# Altium PCB BoardV2.PcbDoc (part 2 of 2)
Units mm, origin at the board's own origin, x right, y up, seen from the top; angles counter-clockwise.
Board outline 173.2 x 200 mm, 2 copper layers (Top Layer, Bottom Layer); 157 components, 96 nets, 533 pads, 72 vias.
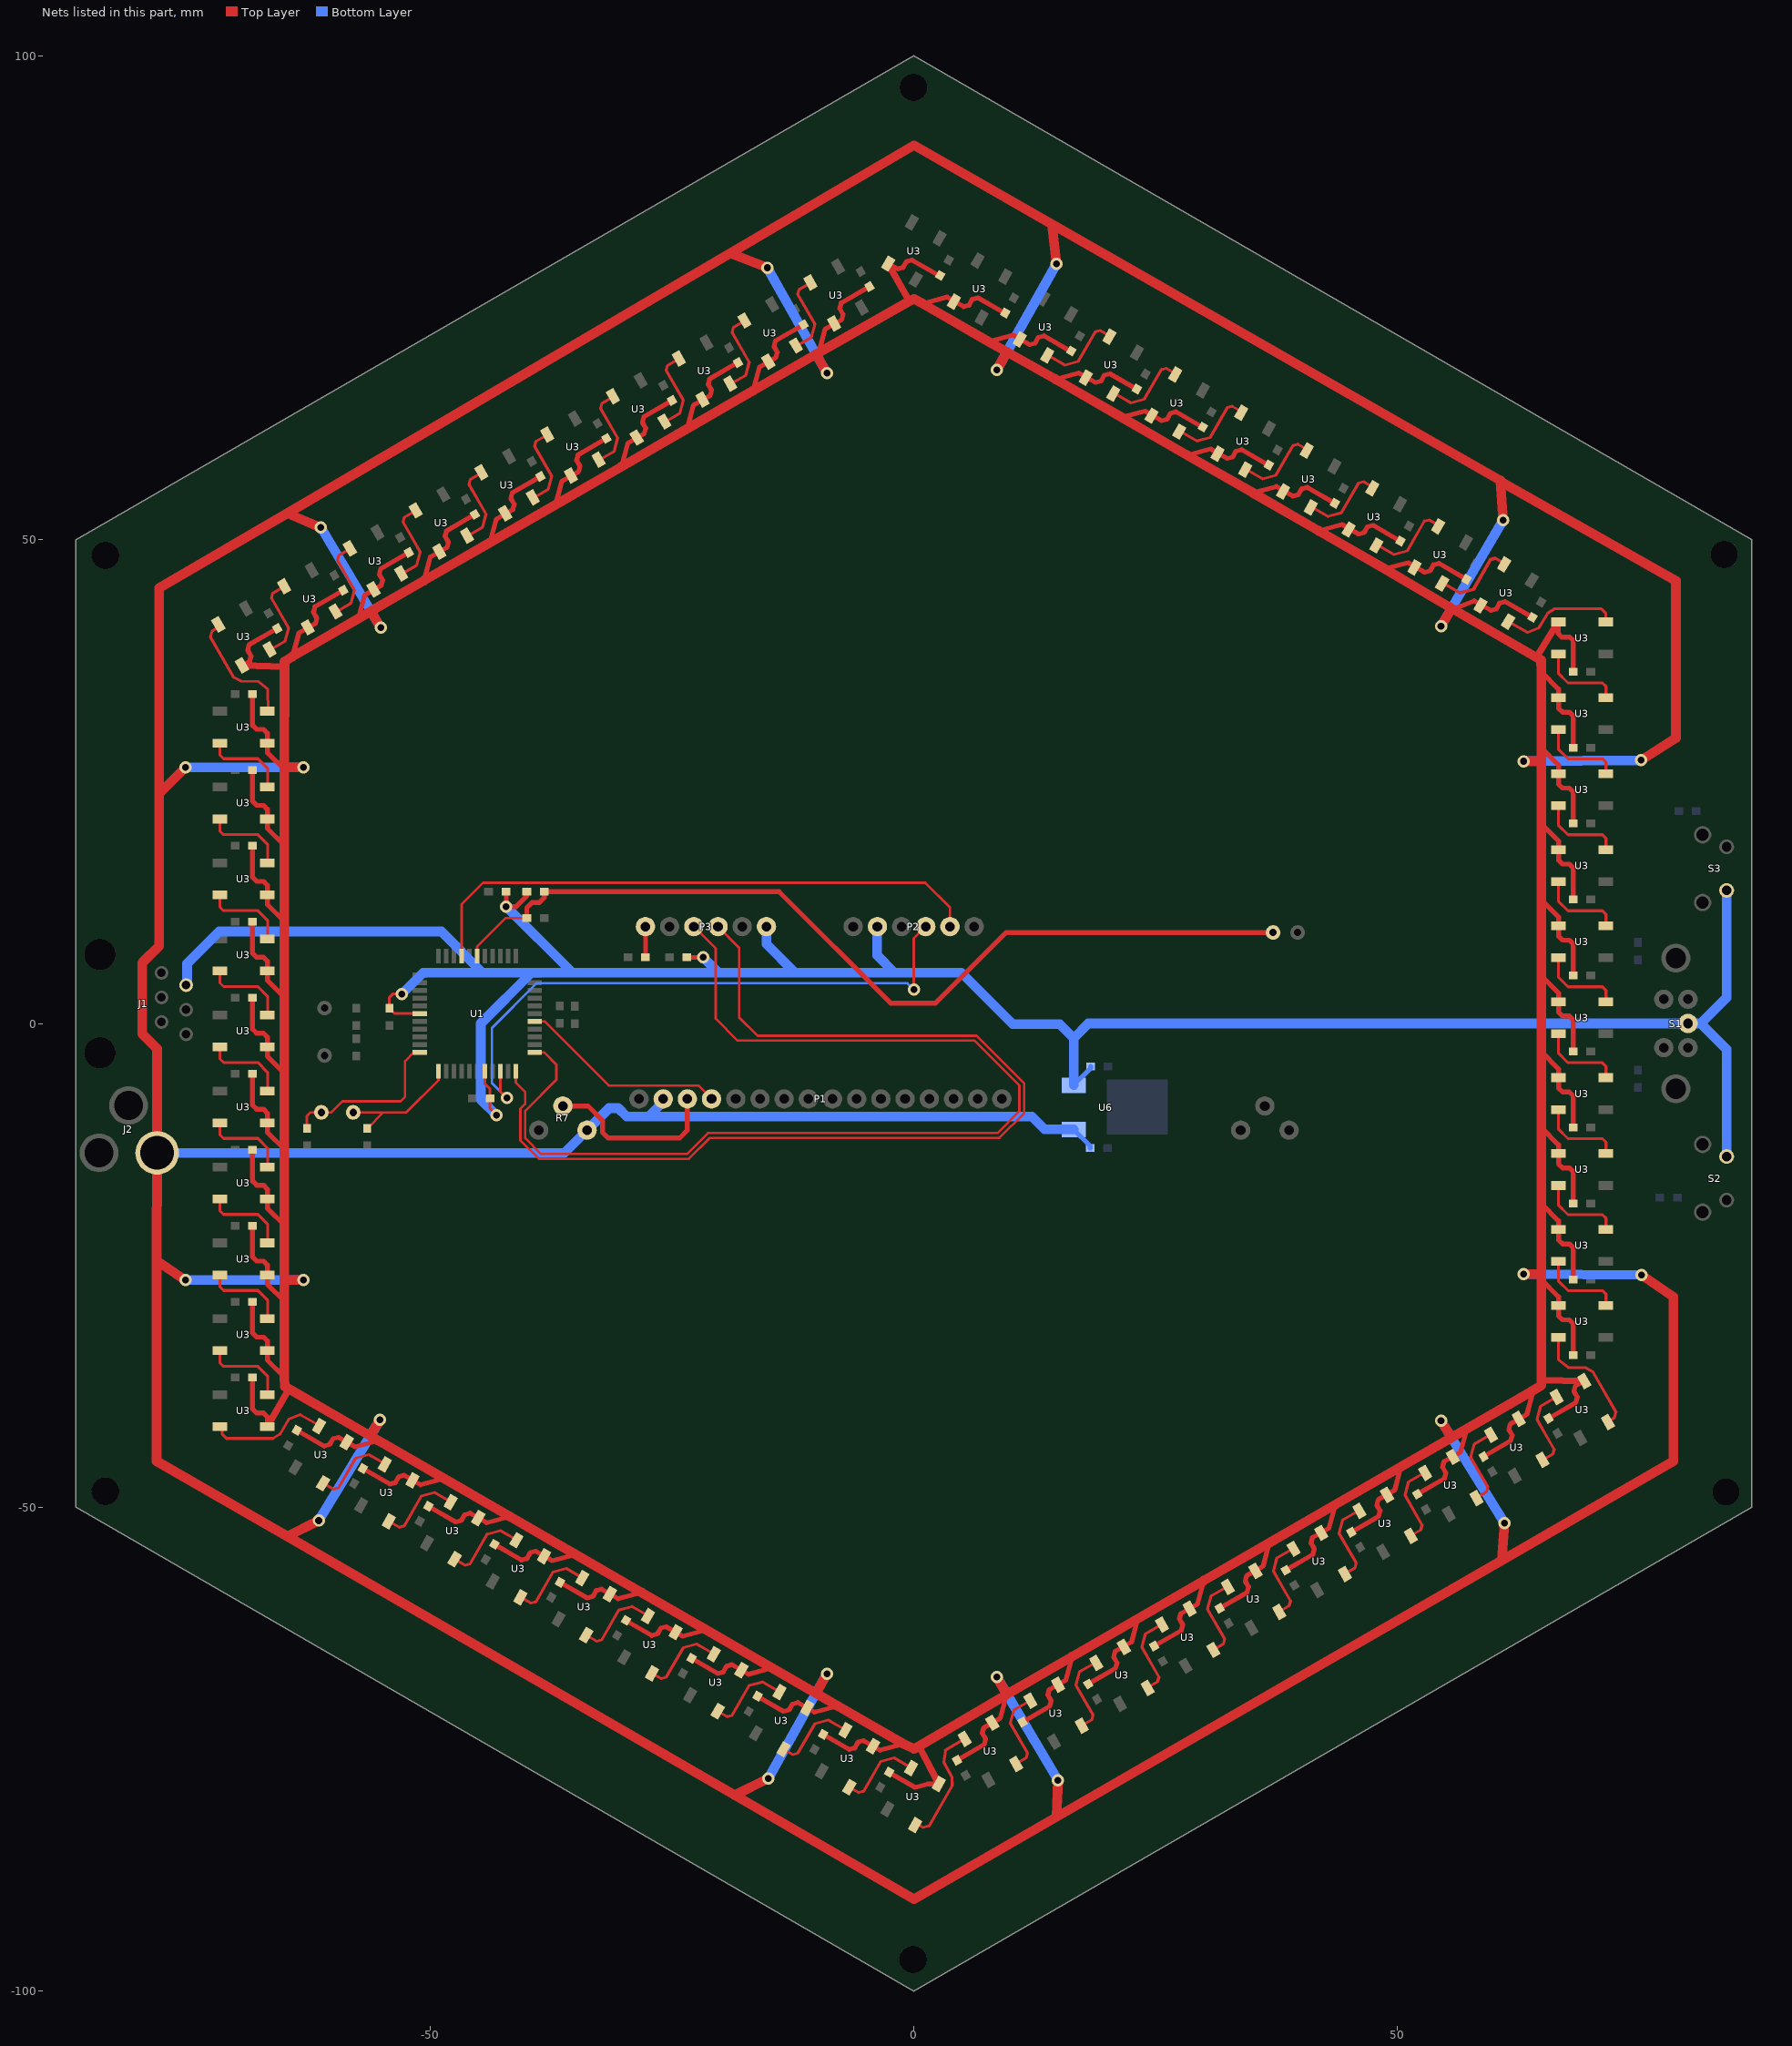
[diagram p2: the nets of this part, all layers, seen from the top]

## Via types
v1: diameter 1.27, hole 0.711, Top Layer to Bottom Layer, 72 vias

## Nets (pads, with @x,y where several pads share a name; then routed paths per layer and width w, separated by ;. In a path a pad name is that pad's centre, name@x,y a point inside that pad or via, vN(x,y) a via of type N, cw(c..) or ccw(c..) an arc to the next point about the centre after c; other vN are vias at no path point) (continued)
PX4: U3.2@13.794,69.032 U3.4@20.206,70.988 | length 8.7
  Top Layer w0.3: U3.2@13.846,69.06 15.605,68.045 16.978,68.413 18.753,71.487 19.26,71.623 U3.4@20.245,71.055
PX5: U3.2@20.614,65.094 U3.4@27.013,67.058 | length 8.7
  Top Layer w0.3: U3.2@20.666,65.152 22.424,64.137 23.797,64.505 25.572,67.579 26.079,67.715 U3.4@27.064,67.146
PX6: U3.2@27.421,61.164 U3.4@33.833,63.12 | length 8.7
  Top Layer w0.3: U3.2@27.486,61.214 29.244,60.199 30.617,60.567 32.392,63.642 32.899,63.778 U3.4@33.884,63.209
PX7: U3.2@34.241,57.227 U3.4@40.61,59.208 | length 8.7
  Top Layer w0.3: U3.2@34.262,57.302 36.021,56.287 37.394,56.655 39.169,59.729 39.676,59.865 U3.4@40.661,59.296
PX8: U3.2@41.018,53.314 U3.4@47.387,55.295 | length 8.7
  Top Layer w0.3: U3.2@41.051,53.411 42.81,52.396 44.183,52.764 45.958,55.838 46.465,55.974 U3.4@47.45,55.406
PX9: U3.2@47.794,49.402 U3.4@54.185,51.37 | length 8.7
  Top Layer w0.3: U3.2@47.85,49.486 49.608,48.471 50.981,48.839 52.756,51.913 53.264,52.049 U3.4@54.248,51.481
PX10: U3.2@54.593,45.477 U3.4@61.005,47.433 | length 17.3
  Top Layer w0.3: U3.2@54.67,45.549 56.428,44.533 57.801,44.901 59.576,47.976 60.083,48.112 U3.4@61.068,47.543 ; U3.2@54.717,45.491 56.476,44.476 57.849,44.844 59.624,47.918 60.131,48.054 U3.4@61.116,47.485
PX11: U3.2@61.413,41.539 U3.4@71.5,41.5 | length 12.6
  Top Layer w0.3: U3.2@61.413,41.539 63.421,40.41 64.6,40.875 65.501,42.389 66.25,42.856 71.044,42.856 71.5,42.4 U3.4@71.5,41.5
PX12: U3.2@66.6,38.2 U3.4@71.5,33.65 | length 8.7
  Top Layer w0.3: U3.2@66.598,38.229 66.598,36.199 67.604,35.193 71.154,35.193 71.525,34.822 U3.4@71.525,33.685
PX13: U3.2@66.6,30.35 U3.4@71.5,25.8 | length 8.7
  Top Layer w0.3: U3.2@66.598,30.379 66.598,28.349 67.604,27.343 71.154,27.343 71.525,26.972 U3.4@71.525,25.835
PX14: U3.2@66.6,22.5 U3.4@71.5,17.95 | length 8.7
  Top Layer w0.3: U3.2@66.598,22.529 66.598,20.499 67.604,19.493 71.154,19.493 71.525,19.122 U3.4@71.525,17.985
PX15: U3.2@66.6,14.65 U3.4@71.5,10.1 | length 8.7
  Top Layer w0.3: U3.2@66.598,14.679 66.598,12.649 67.604,11.643 71.154,11.643 71.525,11.272 U3.4@71.525,10.135
PX16: U3.2@66.6,6.8 U3.4@71.5,2.25 | length 8.7
  Top Layer w0.3: U3.2@66.598,6.829 66.598,4.799 67.604,3.793 71.154,3.793 71.525,3.422 U3.4@71.525,2.285
PX17: U3.2@66.6,-1.05 U3.4@71.5,-5.6 | length 8.7
  Top Layer w0.3: U3.2@66.598,-1.021 66.598,-3.051 67.604,-4.057 71.154,-4.057 71.525,-4.428 U3.4@71.525,-5.565
PX18: U3.2@66.6,-8.9 U3.4@71.5,-13.45 | length 8.7
  Top Layer w0.3: U3.2@66.598,-8.871 66.598,-10.901 67.604,-11.907 71.154,-11.907 71.525,-12.278 U3.4@71.525,-13.415
PX19: U3.2@66.6,-16.75 U3.4@71.5,-21.3 | length 8.7
  Top Layer w0.3: U3.2@66.598,-16.721 66.598,-18.751 67.604,-19.757 71.154,-19.757 71.525,-20.128 U3.4@71.525,-21.265
PX20: U3.2@66.6,-24.6 U3.4@71.5,-29.15 | length 8.7
  Top Layer w0.3: U3.2@66.598,-24.571 66.598,-26.601 67.604,-27.607 71.154,-27.607 71.525,-27.978 U3.4@71.525,-29.115
PX21: U3.2@66.6,-32.45 U3.4@71.729,-41.197 | length 12.6
  Top Layer w0.3: U3.2@66.6,-32.45 66.626,-34.754 67.618,-35.542 69.38,-35.566 70.159,-35.981 72.556,-40.132 72.389,-40.756 U3.4@71.61,-41.206
PX22: U3.2@66.421,-38.603 U3.4@64.95,-45.111 | length 8.7
  Top Layer w0.3: U3.4@65.045,-45.085 66.03,-44.516 66.166,-44.009 64.391,-40.935 64.759,-39.561 U3.2@66.517,-38.546
PX23: U3.2@59.642,-42.517 U3.4@58.148,-49.038 | length 8.7
  Top Layer w0.3: U3.4@58.195,-48.983 59.18,-48.414 59.316,-47.907 57.541,-44.833 57.909,-43.459 U3.2@59.667,-42.444
PX24: U3.2@52.84,-46.444 U3.4@51.35,-52.963 | length 8.7
  Top Layer w0.3: U3.4@51.397,-52.908 52.382,-52.339 52.517,-51.832 50.742,-48.758 51.11,-47.384 U3.2@52.869,-46.369
PX25: U3.2@46.042,-50.369 U3.4@44.551,-56.888 | length 8.7
  Top Layer w0.3: U3.4@44.598,-56.833 45.583,-56.264 45.719,-55.757 43.944,-52.683 44.312,-51.309 U3.2@46.07,-50.294
PX26: U3.2@39.244,-54.294 U3.4@37.753,-60.813 | length 8.7
  Top Layer w0.3: U3.4@37.8,-60.758 38.785,-60.189 38.921,-59.682 37.146,-56.608 37.514,-55.234 U3.2@39.272,-54.219
PX27: U3.2@32.445,-58.219 U3.4@30.955,-64.738 | length 8.7
  Top Layer w0.3: U3.4@31.002,-64.683 31.987,-64.114 32.122,-63.607 30.347,-60.533 30.715,-59.159 U3.2@32.474,-58.144
PX28: U3.2@25.647,-62.144 U3.4@24.156,-68.663 | length 8.7
  Top Layer w0.3: U3.4@24.203,-68.608 25.188,-68.039 25.324,-67.532 23.549,-64.458 23.917,-63.084 U3.2@25.675,-62.069
PX29: U3.2@18.849,-66.069 U3.4@17.358,-72.588 | length 8.7
  Top Layer w0.3: U3.4@17.405,-72.533 18.39,-71.964 18.526,-71.457 16.751,-68.383 17.119,-67.009 U3.2@18.877,-65.994
PX30: U3.2@12.05,-69.994 U3.4@10.56,-76.513 | length 8.7
  Top Layer w0.3: U3.4@10.633,-76.471 11.618,-75.902 11.754,-75.395 9.979,-72.321 10.347,-70.947 U3.2@12.105,-69.932
PX31: U3.2@5.252,-73.919 U3.4@0.129,-82.847 | length 12.6
  Top Layer w0.3: U3.4@0.174,-82.635 0.954,-83.085 1.577,-82.918 3.974,-78.767 3.944,-77.885 3.083,-76.347 3.269,-75.094 U3.2@5.252,-73.919
PX32: U3.2@-0.279,-76.953 U3.4@-6.669,-78.922 | length 8.7
  Top Layer w0.3: U3.4@-6.687,-78.914 -5.702,-79.482 -5.195,-79.346 -3.42,-76.272 -2.046,-75.904 U3.2@-0.288,-76.919
PX33: U3.2@-7.077,-73.028 U3.4@-13.468,-74.997 | length 8.7
  Top Layer w0.3: U3.4@-13.485,-74.989 -12.5,-75.557 -11.993,-75.421 -10.218,-72.347 -8.845,-71.979 U3.2@-7.086,-72.994
PX34: U3.2@-13.876,-69.103 U3.4@-20.266,-71.072 | length 8.7
  Top Layer w0.3: U3.4@-20.283,-71.064 -19.298,-71.632 -18.791,-71.496 -17.016,-68.422 -15.643,-68.054 U3.2@-13.885,-69.069
PX35: U3.2@-20.674,-65.178 U3.4@-27.064,-67.147 | length 8.7
  Top Layer w0.3: U3.4@-27.082,-67.139 -26.097,-67.707 -25.59,-67.571 -23.815,-64.497 -22.441,-64.129 U3.2@-20.683,-65.144
PX36: U3.2@-27.472,-61.253 U3.4@-33.863,-63.222 | length 8.7
  Top Layer w0.3: U3.4@-33.76,-63.264 -32.775,-63.832 -32.268,-63.697 -30.493,-60.622 -29.119,-60.254 U3.2@-27.361,-61.269
PX37: U3.2@-34.27,-57.328 U3.4@-40.661,-59.297 | length 8.7
  Top Layer w0.3: U3.4@-40.558,-59.339 -39.573,-59.907 -39.066,-59.772 -37.291,-56.697 -35.918,-56.329 U3.2@-34.159,-57.344
PX38: U3.2@-41.069,-53.403 U3.4@-47.459,-55.372 | length 8.7
  Top Layer w0.3: U3.4@-47.356,-55.414 -46.371,-55.982 -45.864,-55.847 -44.089,-52.772 -42.716,-52.404 U3.2@-40.958,-53.419
PX39: U3.2@-47.867,-49.478 U3.4@-54.257,-51.447 | length 8.7
  Top Layer w0.3: U3.4@-54.155,-51.489 -53.17,-52.057 -52.663,-51.922 -50.888,-48.847 -49.514,-48.479 U3.2@-47.756,-49.494
PX40: U3.2@-54.665,-45.553 U3.4@-61.056,-47.522 | length 8.7
  Top Layer w0.3: U3.4@-60.953,-47.564 -59.968,-48.132 -59.461,-47.997 -57.686,-44.922 -56.313,-44.554 U3.2@-54.554,-45.569
PX41: U3.2@-61.464,-41.628 U3.4@-71.725,-41.675 | length 12.6
  Top Layer w0.3: U3.4@-71.483,-41.523 -71.483,-42.423 -71.027,-42.88 -66.233,-42.88 -65.484,-42.413 -64.583,-40.898 -63.405,-40.433 U3.2@-61.396,-41.563
PX42: U3.2@-66.825,-38.375 U3.4@-71.725,-33.825 | length 8.7
  Top Layer w0.3: U3.4@-71.71,-33.93 -71.71,-35.067 -71.339,-35.438 -67.789,-35.438 -66.783,-36.444 U3.2@-66.783,-38.474
PX43: U3.2@-66.825,-30.525 U3.4@-71.725,-25.975 | length 8.7
  Top Layer w0.3: U3.4@-71.71,-26.08 -71.71,-27.217 -71.339,-27.588 -67.789,-27.588 -66.783,-28.594 U3.2@-66.783,-30.624
PX44: U3.2@-66.825,-22.675 U3.4@-71.725,-18.125 | length 8.7
  Top Layer w0.3: U3.4@-71.71,-18.23 -71.71,-19.367 -71.339,-19.738 -67.789,-19.738 -66.783,-20.744 U3.2@-66.783,-22.774
PX45: U3.2@-66.825,-14.825 U3.4@-71.725,-10.275 | length 8.7
  Top Layer w0.3: U3.4@-71.71,-10.38 -71.71,-11.517 -71.339,-11.888 -67.789,-11.888 -66.783,-12.894 U3.2@-66.783,-14.924
PX46: U3.2@-66.825,-6.975 U3.4@-71.725,-2.425 | length 8.7
  Top Layer w0.3: U3.4@-71.71,-2.53 -71.71,-3.667 -71.339,-4.038 -67.789,-4.038 -66.783,-5.044 U3.2@-66.783,-7.074
PX47: U3.2@-66.825,0.875 U3.4@-71.725,5.425 | length 8.7
  Top Layer w0.3: U3.4@-71.71,5.32 -71.71,4.183 -71.339,3.812 -67.789,3.812 -66.783,2.806 U3.2@-66.783,0.776
PX48: U3.2@-66.825,8.725 U3.4@-71.725,13.275 | length 8.7
  Top Layer w0.3: U3.4@-71.71,13.17 -71.71,12.033 -71.339,11.662 -67.789,11.662 -66.783,10.656 U3.2@-66.783,8.626
PX49: U3.2@-66.825,16.575 U3.4@-71.725,21.125 | length 8.7
  Top Layer w0.3: U3.4@-71.71,21.02 -71.71,19.883 -71.339,19.512 -67.789,19.512 -66.783,18.506 U3.2@-66.783,16.476
PX50: U3.2@-66.825,24.425 U3.4@-71.725,28.975 | length 8.7
  Top Layer w0.3: U3.4@-71.71,28.87 -71.71,27.733 -71.339,27.362 -67.789,27.362 -66.783,26.356 U3.2@-66.783,24.326
PX51: U3.2@-66.825,32.275 U3.4@-71.879,41.247 | length 12.6
  Top Layer w0.3: U3.4@-71.744,41.01 -72.523,40.56 -72.691,39.936 -70.294,35.785 -69.515,35.37 -67.753,35.347 -66.76,34.558 U3.2@-66.734,32.254
PX52: U3.2@-66.571,38.653 U3.4@-65.081,45.172 | length 8.7
  Top Layer w0.3: U3.2@-66.73,38.48 -64.972,39.495 -64.604,40.869 -66.379,43.943 -66.243,44.45 U3.4@-65.258,45.019
PX53: U3.2@-59.773,42.578 U3.4@-58.282,49.097 | length 8.7
  Top Layer w0.3: U3.2@-59.932,42.405 -58.173,43.42 -57.805,44.794 -59.58,47.868 -59.445,48.375 U3.4@-58.46,48.944
PX54: U3.2@-52.974,46.503 U3.4@-51.484,53.022 | length 8.7
  Top Layer w0.3: U3.2@-53.133,46.33 -51.375,47.345 -51.007,48.719 -52.782,51.793 -52.646,52.3 U3.4@-51.661,52.869
PX55: U3.2@-46.176,50.428 U3.4@-44.686,56.947 | length 8.7
  Top Layer w0.3: U3.2@-46.335,50.255 -44.577,51.27 -44.209,52.644 -45.984,55.718 -45.848,56.225 U3.4@-44.863,56.794
PX56: U3.2@-39.378,54.353 U3.4@-37.887,60.872 | length 8.7
  Top Layer w0.3: U3.2@-39.537,54.18 -37.779,55.195 -37.411,56.569 -39.186,59.643 -39.05,60.15 U3.4@-38.065,60.719
PX57: U3.2@-32.58,58.278 U3.4@-31.089,64.797 | length 8.7
  Top Layer w0.3: U3.2@-32.739,58.105 -30.98,59.12 -30.612,60.494 -32.387,63.568 -32.251,64.075 U3.4@-31.266,64.644
PX58: U3.2@-25.781,62.203 U3.4@-24.291,68.722 | length 8.7
  Top Layer w0.3: U3.2@-25.94,62.03 -24.182,63.045 -23.814,64.419 -25.589,67.493 -25.453,68 U3.4@-24.468,68.569
PX59: U3.2@-18.983,66.128 U3.4@-17.493,72.647 | length 8.7
  Top Layer w0.3: U3.2@-19.142,65.955 -17.384,66.97 -17.016,68.344 -18.791,71.418 -18.655,71.925 U3.4@-17.67,72.494
PX60: U3.2@-12.185,70.053 U3.4@-10.694,76.572 | length 8.7
  Top Layer w0.3: U3.2@-12.344,69.88 -10.585,70.895 -10.217,72.269 -11.992,75.343 -11.856,75.85 U3.4@-10.872,76.419
RS: P1.4 U1.5 | length 21.6
  Top Layer w0.254: U1.5@-39.175,0.225 -38.175,0.225 -31.534,-6.417 -22.283,-6.417 P1.4@-20.902,-7.798
RX: P2.2 U1.19 | length 59.8
  Top Layer w0.254: U1.19@-46.725,6.975 -46.725,12.332 -44.515,14.542 1.183,14.542 3.73,11.995 P2.2@3.73,10.007
SCL: P3.3 U1.44 | length 108.2
  Top Layer w0.254: U1.44@-41.125,-4.925 -41.125,-6.125 -40.175,-7.075 -40.175,-8.325 -40.66,-8.81 -40.66,-12.083 -38.749,-13.994 -23.231,-13.994 -21.063,-11.826 8.842,-11.826 11.408,-9.26 11.408,-6.19 6.488,-1.27 -16.155,-1.27 -18.05,0.625 -18.05,7.819 P3.3@-20.238,10.008
SDA: P3.4 U1.1 | length 112.6
  Top Layer w0.254: U1.1@-39.175,-2.975 -38.225,-2.975 -36.941,-4.259 -36.941,-5.809 -40.152,-9.02 -40.152,-11.873 -38.539,-13.486 -23.441,-13.486 -21.273,-11.318 8.632,-11.318 10.9,-9.05 10.9,-6.4 6.278,-1.778 -18.197,-1.778 -20.475,0.5 -20.475,7.744 P3.4@-22.738,10.008
SDO: P3.6 R9.2 | length 3.2
  Top Layer w0.5: R9.2@-27.725,6.825 P3.6@-27.725,9.994
SOSCI: C3.1 U1.33 Y2.2 | length 17.8
  Top Layer w0.254: C3.1@-62.725,-10.85 -62.725,-9.575 -62.345,-9.195 Y2.2@-61.238,-9.195 -60.195,-9.195 -59.052,-8.052 -53.052,-8.052 -52.575,-7.575 -52.575,-3.9 -51.65,-2.975 U1.33@-51.075,-2.975
SOSCO: C7.1 U1.34 Y2.1 | length 15.9
  Top Layer w0.254: Y2.1@-57.938,-9.195 -52.445,-9.195 ; C7.1@-56.475,-10.85 -54.82,-9.195 -52.445,-9.195 ; U1.34@-49.125,-4.925 -49.125,-5.875 -52.445,-9.195
TX: P2.3 U1.42 | length 63.7
  Top Layer w0.254: U1.42@-42.725,-4.925 -42.725,-7.025 v1(-42.05,-7.7) ; v1(0,3.5) 0,8.778 P2.3@1.23,10.008
  Bottom Layer w0.254: v1(-42.05,-7.7) -43.6,-6.15 -43.6,-0.45 -39,4.15 -0.65,4.15 v1(0,3.5)
V0: P1.3 R7.2 | length 18.5
  Top Layer w0.5: R7.2@-36.271,-8.529 -33.671,-8.529 -32.175,-10.025 -32.175,-11.25 -31.586,-11.839 -24.214,-11.839 -23.402,-11.027 P1.3@-23.402,-7.798
V3P3: C4.2 C5.2 C12.2 J1.5 L1.1 P2.5 P3.1 R4.2 R8.1 S1.2 S2.1 S3.2 U1.28 U1.40 U6.3 | length 269.4
  Top Layer w0.3: v1(-52.907,3.05) -53.85,3.05 -54.204,2.696 C5.2@-54.204,1.586 -53.643,1.025 U1.28@-51.075,1.025 ; U1.40@-44.325,-4.925 -44.325,-6.25 -43.804,-6.771 -43.804,-8.796 v1(-43.125,-9.475)
  Top Layer w0.5: v1(-42.125,12.075) R4.2@-42.125,13.6 ; v1@-42.052,12.075 -41.1,12.075 -40,13.175 L1.1@-40,13.625 ; R8.1@-23.45,6.825 v1(-21.775,6.825)
  Bottom Layer w0.5: U6.3@16.517,-6.376 18.275,-4.618 C12.2@18.275,-4.45
  Bottom Layer w1: J1.5@-75.2,3.96 -75.1,4.06 -75.1,6.175 -71.775,9.5 -48.825,9.5 -44.575,5.25 ; v1(-52.907,3.05) -50.707,5.25 -39.5,5.25 ; v1(-43.125,-9.475) -44.75,-7.85 -44.75,0 -39.5,5.25 ; v1(-42.125,12.075) -35.425,5.375 ; v1(-21.775,6.825) -20.2,5.25 ; P3.1@-15.238,10.008 -15.238,8.213 -12.3,5.275 ; P2.5@-3.8,10.008 -3.8,7.05 -2,5.25 ; U6.3@16.517,-6.376 16.517,-1.525 ; 83.908,2.583 81.325,0 ; 83.995,2.67 S3.2@83.995,13.75 ; S2.1@84,-13.75 84,-2.675 81.325,0 ; -39.5,5.25 -20.2,5.25 ; -20.2,5.25 -2,5.25 ; -2,5.25 4.9,5.25 10.225,-0.075 15.075,-0.075 16.525,-1.525 18.05,0 S1.2@80,0 81.325,0
V3P3A: C6.2 L1.2 LDR1.1 U1.17 | length 94.4
  Top Layer w0.254: U1.17@-45.125,6.975 -45.125,7.95 -42.175,10.9 C6.2@-40,10.9
  Top Layer w0.5: C6.2@-40,10.9 -40,11.95 -39.45,12.5 -38.7,12.5 -38.2,13 L1.2@-38.2,13.625 -13.925,13.625 -2.4,2.1 2.25,2.1 9.55,9.4 LDR1.1@37.13,9.4
V5: C10.2 C11.2 J2.1 P1.2 R7.1 U3.1 U6.1 | length 1839.1
  Top Layer w0.5: U3.1@-69.429,37.003 -68.643,37.404 -68.495,37.958 -68.845,38.564 -68.691,39.14 C10.2@-65.883,40.761 ; C10.2@-68.335,-36.6 -68.335,-39.842 -67.914,-40.263 -67.214,-40.263 -66.808,-40.669 -66.808,-41.646 U3.1@-66.808,-41.658 ; C10.2@-68.335,-28.75 -68.335,-31.992 -67.914,-32.413 -67.214,-32.413 -66.808,-32.819 -66.808,-34.794 -65.039,-36.563 ; C10.2@-68.335,-20.9 -68.335,-24.142 -67.914,-24.563 -67.214,-24.563 -66.808,-24.969 -66.808,-26.944 -65.039,-28.713 ; C10.2@-68.335,-13.05 -68.335,-16.292 -67.914,-16.713 -67.214,-16.713 -66.808,-17.119 -66.808,-19.094 -65.039,-20.863 ; C10.2@-68.335,-5.2 -68.335,-8.442 -67.914,-8.863 -67.214,-8.863 -66.808,-9.269 -66.808,-11.244 -65.039,-13.013 ; C10.2@-68.335,2.65 -68.335,-0.592 -67.914,-1.013 -67.214,-1.013 -66.808,-1.419 -66.808,-3.394 -65.039,-5.163 ; C10.2@-68.335,10.5 -68.335,7.258 -67.914,6.837 -67.214,6.837 -66.808,6.431 -66.808,4.456 -65.039,2.687 ; C10.2@-68.335,18.35 -68.335,15.108 -67.914,14.687 -67.214,14.687 -66.808,14.281 -66.808,12.306 -65.039,10.537 ; C10.2@-68.335,26.2 -68.335,22.958 -67.914,22.537 -67.214,22.537 -66.808,22.131 -66.808,20.156 -65.039,18.387 ; C10.2@-68.335,34.05 -68.335,30.808 -67.914,30.387 -67.214,30.387 -66.808,29.981 -66.808,28.006 -65.039,26.237 ; -64.203,37.925 -63.555,40.342 -62.608,40.889 -61.845,41.329 -61.696,41.883 -62.046,42.489 -61.892,43.065 C10.2@-59.084,44.686 ; C10.2@-63.752,-42.051 -60.944,-43.672 -60.368,-43.518 -60.018,-42.912 -59.464,-42.763 -58.597,-43.264 -57.754,-43.751 -55.999,-43.281 -55.337,-43.103 ; -57.405,41.85 -56.757,44.267 -55.81,44.814 -55.047,45.254 -54.898,45.808 -55.248,46.414 -55.094,46.99 C10.2@-52.286,48.611 ; C10.2@-56.953,-45.976 -54.145,-47.597 -53.57,-47.443 -53.22,-46.837 -52.666,-46.688 -50.956,-47.676 -48.538,-47.028 ; -50.606,45.775 -49.959,48.192 -48.248,49.179 -48.1,49.733 -48.45,50.339 -48.296,50.915 C10.2@-45.488,52.536 ; C10.2@-50.155,-49.901 -47.347,-51.522 -46.772,-51.368 -46.422,-50.762 -45.868,-50.613 -44.157,-51.601 -41.74,-50.953 ; -43.808,49.7 -43.16,52.117 -42.213,52.664 -41.45,53.104 -41.302,53.658 -41.652,54.264 -41.497,54.84 C10.2@-38.69,56.461 ; C10.2@-43.357,-53.826 -40.549,-55.447 -39.973,-55.293 -39.623,-54.687 -39.07,-54.538 -38.203,-55.039 -37.359,-55.526 -34.942,-54.878 ; -37.01,53.625 -36.362,56.042 -35.415,56.589 -34.652,57.029 -34.503,57.583 -34.853,58.189 -34.699,58.765 C10.2@-31.891,60.386 ; C10.2@-36.558,-57.751 -33.75,-59.372 -33.175,-59.218 -32.825,-58.612 -32.271,-58.463 -31.404,-58.964 -30.561,-59.451 -28.144,-58.803 ; -30.211,57.55 -29.564,59.967 -28.616,60.514 -27.853,60.954 -27.705,61.508 -28.055,62.114 -27.901,62.69 C10.2@-25.093,64.311 ; C10.2@-29.88,-61.626 -29.768,-61.69 -27.072,-63.247 -26.497,-63.093 -26.147,-62.486 -25.593,-62.338 U3.1@-24.614,-62.903 -23.883,-63.326 -21.465,-62.678 ; -23.413,61.475 -22.765,63.892 -21.818,64.439 -21.055,64.879 -20.907,65.433 -21.257,66.039 -21.103,66.615 C10.2@-18.295,68.236 ; C10.2@-23.082,-65.551 -22.97,-65.615 -20.274,-67.172 -19.699,-67.018 -19.349,-66.411 -18.795,-66.263 U3.1@-17.816,-66.828 -17.084,-67.251 -14.667,-66.603 ; -16.615,65.4 -15.967,67.817 -15.02,68.364 -14.257,68.804 -14.108,69.358 -14.458,69.964 -14.304,70.54 C10.2@-11.496,72.161 ; C10.2@-16.284,-69.476 -16.172,-69.54 -13.476,-71.097 -12.9,-70.943 -12.55,-70.336 -11.997,-70.188 U3.1@-11.018,-70.753 -10.286,-71.176 -7.869,-70.528 ; -9.817,69.325 -9.169,71.742 -8.222,72.289 -7.458,72.729 -7.31,73.283 -7.66,73.889 -7.506,74.465 C10.2@-4.698,76.086 ; C10.2@-9.485,-73.401 -9.373,-73.465 -6.677,-75.022 -6.102,-74.868 -5.752,-74.261 -5.198,-74.113 -3.488,-75.101 -1.071,-74.453 -1.059,-74.45 ; C10.2@-2.687,-77.326 -2.575,-77.39 0.121,-78.947 1.403,-78.603 U3.1@2.579,-78.603 ; U3.1@-2.654,78.528 -1.659,77.982 -1.105,78.13 -0.755,78.736 -0.18,78.89 C10.2@2.628,77.269 ; 0.917,74.395 3.437,75.07 4.168,74.648 5.147,74.083 5.701,74.231 6.051,74.837 6.626,74.991 C10.2@9.434,73.37 ; C10.2@4.459,-76.138 7.267,-74.517 7.421,-73.941 7.071,-73.335 7.22,-72.781 U3.1@8.11,-72.269 8.93,-71.794 9.578,-69.376 ; 7.721,70.453 10.257,71.133 10.962,70.726 11.967,70.145 12.521,70.293 12.871,70.9 13.446,71.054 16.233,69.445 C10.2@16.254,69.433 ; C10.2@11.232,-72.2 14.039,-70.579 14.194,-70.004 13.844,-69.397 13.992,-68.844 14.895,-68.322 15.702,-67.856 16.35,-65.439 ; 14.659,66.577 17.076,67.224 17.794,66.81 18.787,66.237 19.341,66.385 19.691,66.991 20.266,67.146 23.048,65.539 C10.2@23.074,65.524 ; C10.2@18.03,-68.275 20.838,-66.654 20.992,-66.079 20.642,-65.472 20.79,-64.919 21.694,-64.397 22.501,-63.931 23.148,-61.514 ; 21.479,62.639 23.896,63.287 24.601,62.88 25.607,62.299 26.16,62.448 26.51,63.054 27.086,63.208 29.846,61.614 C10.2@29.894,61.587 ; C10.2@24.828,-64.35 27.636,-62.729 27.79,-62.154 27.44,-61.547 27.589,-60.994 28.492,-60.472 29.299,-60.006 29.947,-57.589 ; 28.256,58.727 30.673,59.374 31.421,58.942 32.383,58.387 32.937,58.535 33.287,59.141 33.862,59.296 36.666,57.677 C10.2@36.67,57.674 ; C10.2@31.626,-60.425 34.434,-58.804 34.589,-58.229 34.239,-57.622 34.387,-57.069 35.29,-56.547 36.097,-56.081 36.745,-53.664 ; 35.045,54.836 37.462,55.483 38.21,55.051 39.172,54.496 39.726,54.644 40.076,55.25 40.652,55.405 C10.2@43.46,53.784 ; C10.2@38.425,-56.5 41.233,-54.879 41.387,-54.304 41.037,-53.697 41.185,-53.144 42.896,-52.156 43.543,-49.739 ; 41.843,50.911 44.26,51.558 44.987,51.139 45.971,50.571 46.525,50.719 46.875,51.326 47.45,51.48 C10.2@50.258,49.859 ; C10.2@45.223,-52.575 48.031,-50.954 48.185,-50.379 47.835,-49.772 47.984,-49.219 49.694,-48.231 50.342,-45.814 ; 48.663,46.973 51.08,47.621 51.785,47.214 52.791,46.633 53.345,46.782 53.695,47.388 54.27,47.542 C10.2@57.078,45.921 ; C10.2@52.021,-48.65 54.829,-47.029 54.983,-46.454 54.633,-45.847 54.782,-45.294 55.685,-44.772 56.492,-44.306 57.14,-41.889 ; 55.731,42.804 57.917,43.672 58.605,43.275 59.627,42.685 60.181,42.833 60.531,43.439 61.107,43.594 C10.2@63.914,41.972 ; C10.2@58.871,-44.752 61.679,-43.131 61.833,-42.555 61.483,-41.949 61.632,-41.395 62.512,-40.887 63.342,-40.408 63.965,-38.085 63.99,-37.991 ; 64.854,-37.386 64.861,-37.394 ; 64.854,-26.482 66.623,-28.251 66.623,-30.226 67.029,-30.632 67.729,-30.632 68.15,-31.053 C10.2@68.15,-34.295 ; 64.854,-18.632 66.623,-20.401 66.623,-22.376 67.029,-22.782 67.729,-22.782 68.15,-23.203 C10.2@68.15,-26.445 ; 64.854,-10.782 66.623,-12.551 66.623,-14.526 67.029,-14.932 67.729,-14.932 68.15,-15.353 C10.2@68.15,-18.595 ; 64.854,-2.932 66.623,-4.701 66.623,-6.676 67.029,-7.082 67.729,-7.082 68.15,-7.503 C10.2@68.15,-10.745 ; 64.854,4.918 66.623,3.149 66.623,1.174 67.029,0.768 67.729,0.768 68.15,0.347 C10.2@68.15,-2.895 ; 64.854,12.768 66.623,10.999 66.623,9.024 67.029,8.618 67.729,8.618 68.15,8.197 C10.2@68.15,4.955 ; 64.854,20.618 66.623,18.849 66.623,16.874 67.029,16.468 67.729,16.468 68.15,16.047 C10.2@68.15,12.805 ; 64.854,28.468 66.623,26.699 66.623,24.724 67.029,24.318 67.729,24.318 68.15,23.897 C10.2@68.15,20.655 ; 64.854,36.318 66.623,34.549 66.623,32.574 67.029,32.168 67.729,32.168 68.15,31.747 C10.2@68.15,28.505 ; C10.2@65.597,-40.812 68.405,-39.191 68.559,-38.616 68.209,-38.009 68.358,-37.456 U3.1@69.279,-36.953 ; U3.1@66.6,41.5 66.6,40.275 66.95,39.925 67.775,39.925 68.15,39.55 C10.2@68.15,36.355
  Top Layer w0.7: U3.1@-69.429,37.003 -65.036,36.875 ; U3.1@-66.825,-41.675 -66.808,-41.646 -64.575,-37.766 ; U3.1@-2.654,78.528 -0.45,74.635 ; 0.525,-74.682 U3.1@2.579,-78.603 ; 9.578,-69.376 9.587,-69.344 ; 64.334,37.834 U3.1@66.6,41.5 ; 64.854,-36.875 U3.1@69.279,-36.953
  Top Layer w1: v1(-75.275,-26.525) -78.25,-24.5 ; v1(-75.275,26.475) -78,23.75 ; -65.025,26.475 v1(-63.075,26.475) ; v1(-63.075,-26.525) -65.039,-26.525 ; v1(-61.5,-51.375) -64.75,-53 ; v1(-61.275,51.25) -64.75,52.713 ; -56.175,-42.625 -56.172,-42.62 ; -56.1,42.575 v1(-55.1,40.9) ; v1(-55.175,-40.975) -56.172,-42.62 ; -19.001,79.591 0,90.75 14.25,82.607 ; v1(-15.125,78.1) -19,79.589 -64.75,52.713 ; v1(-15.05,-78.05) -18.5,-79.75 ; -10.1,-69.225 v1(-8.99,-67.225) ; -10.075,69.125 v1(-8.99,67.225) ; -1.071,-74.453 -7.869,-70.528 -10.106,-69.236 -14.667,-66.603 -21.472,-62.655 -28.144,-58.803 -34.942,-54.878 -41.74,-50.953 -48.538,-47.028 -55.337,-43.103 -56.172,-42.62 ; -1.059,-74.45 0.028,-74.974 0.525,-74.682 9.578,-69.376 ; v1(8.576,-67.55) 9.575,-69.25 ; v1(8.576,67.55) 9.6,69.375 ; 9.587,-69.344 9.618,-69.325 16.35,-65.439 29.947,-57.589 36.745,-53.664 43.543,-49.739 55.564,-42.799 57.14,-41.889 63.799,-38.041 64.861,-37.394 ; v1(14.75,78.5) 14.25,82.607 ; v1(14.9,-78.225) 14.75,-82 ; v1(54.475,-41.05) 55.55,-42.775 ; v1(54.475,41.05) 55.5,42.775 ; 55.57,42.897 55.397,42.997 48.663,46.973 41.843,50.911 35.045,54.836 28.256,58.727 21.479,62.639 14.659,66.577 9.612,69.396 7.721,70.453 0.917,74.395 0.005,74.893 -0.45,74.635 -9.817,69.325 -10.097,69.163 -16.615,65.4 -23.413,61.475 -30.211,57.55 -37.01,53.625 -43.808,49.7 -50.606,45.775 -56.112,42.596 -57.405,41.85 -64.203,37.925 -65.036,37.4 -65.036,36.875 -65.039,26.475 -65.039,26.237 -65.039,18.387 -65.039,10.537 -65.039,2.687 -65.039,-5.163 -65.039,-13.013 -65.039,-20.863 -65.039,-26.525 ; 55.731,42.804 64.334,37.834 64.825,37.55 64.854,36.318 64.854,28.468 64.854,20.618 64.854,12.768 64.854,4.918 64.854,-2.932 64.854,-10.782 64.854,-18.632 64.854,-26.482 64.854,-36.875 64.854,-37.386 ; 60.617,56.014 78.75,45.75 78.75,29.5 v1(75.15,27.2) ; 60.63,56.04 v1(60.9,52) ; 60.658,56.088 14.25,82.607 ; v1(61.05,-51.65) 60.75,-55.5 ; v1(63,-25.9) 64.8,-25.9 ; v1(63,27.1) 64.825,27.1 ; v1(75.2,-26) 78.5,-28.25 78.5,-45.25 60.75,-55.5 ; -78.25,-24.5 J2.1@-78.2,-13.375 -78.2,-2.6 -79.75,-1.05 -79.75,6.25 -78,8 -78,23.75 ; -78.25,-24.5 -78.25,-45.25 -64.75,-53 ; -78,23.75 -78,45 -64.75,52.713 ; -65.039,-26.525 -65.039,-28.713 -65.039,-36.563 -65.023,-37.507 -64.575,-37.766 -56.172,-42.62 ; -64.75,-53 -18.5,-79.75 ; -18.5,-79.75 0,-90.5 14.75,-82 ; 14.75,-82 60.75,-55.5
  Bottom Layer w0.5: U6.1@16.517,-10.946 18.226,-12.656 C11.2@18.226,-12.878
  Bottom Layer w1: J2.1@-78.2,-13.375 -36.117,-13.375 -31.492,-8.75 -30.55,-8.75 -29.675,-9.625 -27.4,-9.625 ; v1(-75.275,-26.525) v1(-63.075,-26.525) ; v1(-75.275,26.475) v1(-63.075,26.475) ; v1(-61.5,-51.375) v1(-55.175,-40.975) ; v1(-61.275,51.25) v1(-55.1,40.9) ; P1.2@-25.902,-7.798 -25.902,-8.127 -27.4,-9.625 ; v1(-15.125,78.1) v1(-8.99,67.225) ; v1(-15.05,-78.05) v1(-8.99,-67.225) ; v1(8.576,-67.55) v1(14.9,-78.225) ; v1(8.576,67.55) v1(14.75,78.5) ; U6.1@16.517,-10.946 13.521,-10.946 12.2,-9.625 -27.4,-9.625 ; v1(54.475,-41.05) v1(61.05,-51.65) ; v1(54.475,41.05) v1(60.9,52) ; v1(63,-25.9) v1(75.2,-26) ; v1(63,27.1) v1(75.15,27.2)
pads on no net: ?.1 ?.2 ?.3 ?.4 ?.5 ?.6 ?.7 ?.8 ?.9 ?.10 ?.11 ?.12 ?.13 ?.14 ?.15 ?.16 J1.0 J1.1 P2.1 P2.6 R3.3 S1.0 S1.D S1.E S2.0 S3.0 U1.25 U1.26 U1.27 U1.32 U1.35 U1.38 U1.41

## Polygon pours and split planes (outlines as drawn)
GND on Bottom Layer "GND Pour" (solid, remove dead copper, pour order 29): -86.25,49.75 -86.25,-49.75 0,-99.5 86.25,-49.75 86.25,49.75 0,99.5 0,99.25 0,99.5

## Silkscreen, mask and mechanical layers (free items; w line width, h text height)
Top Overlay:
  circle w0.254: c48.369,-6.4 r1.643
  region: 51.558,11.927 51.558,13.959 53.59,13.959
  region: 56.434,6.44 54.199,6.44 56.434,8.676
  region: 56.434,11.317 53.793,8.676 53.793,6.44 51.558,6.44 51.558,8.879 51.761,9.082 53.996,11.317 53.996,13.959 56.434,13.959
  region: 49.729,13.756 49.526,13.552 49.322,13.349 45.055,9.082 44.852,8.879 45.055,8.879 50.135,8.879 50.135,4.408 47.9,4.408 47.9,7.05 42.617,7.05 42.617,8.676 42.82,8.879 47.697,13.756 47.9,13.959 49.932,13.959
  lines w0.2: 46.675,-13.8 48.35,-12.125 ; 46.75,-9.475 47.75,-10.475 48.35,-10.475 48.95,-10.475 49.937,-9.488 ; 47.719,-5.85 47.719,-5.675 ; 48.35,-8.025 48.35,-12.1 50.025,-13.775 ; 48.994,-5.85 48.994,-5.675
  lines w0.254: 47.747,-6.659 ccw(c48.344,-6.725) 48.942,-6.681
  lines w1: -76.85,-17.15 -76.85,-44.425 -0.075,-88.9 77.075,-44.425 77.075,-11.026 ; -76.675,7.75 -76.675,44.225 0,89.175 77.282,44.8 77.282,9.801 ; -61.314,-35.512 -0.12,-70.265 60.975,-35.225 ; -61.3,-35.512 -61.3,-21.025 ; -61.075,7.275 -61.075,35.275 0,70.2 61.175,35.1 61.175,-35.225
  text "Made in France" at 16.55,83.725 h4 r330
  text "Designed in Labelec" at -71.8,51.1 h4 r30
  text "Rainbow Clock V1.0" at -26.875,-2.725 h4
  text "5V max" at -81.15,-21.825 h3 r270
  text "4000mA" at -85.05,-21.925 h3 r270
  text "SCHIAD - VCHESNEA" at -70.7,-56.3 h4 r330
  text "2016 - Paris" at 23.475,-83.225 h4 r30
Mechanical 1:
  lines w0.2: -69.29,39.747 -69.29,-40.093 -0.147,-80.013 ; -69.268,39.912 -0.125,79.832 ; -0.076,-79.874 69.067,-39.954 ; -0.032,79.868 69.111,39.948 ; 69.072,-39.992 69.072,39.848
Mechanical 2:
  lines w0.2: -86.6,-50 0,-100 86.6,-50 86.6,50 0,100 -86.6,50 -86.6,-50 ; -54.125,-31.25 -54.125,-16 54.125,-16 54.125,-31.225 0,-62.475 -54.125,-31.25 ; -54.125,16 54.125,16 54.125,31.25 0,62.475 -54.125,31.25 -54.125,16
Drill Drawing:
  circle w0.025: c99.29,-66.432 r0.381
  circle w0.025: c99.29,-66.432 r0.635
  circle w0.025: c99.29,-81.672 r0.635
  lines w0.025: 98.655,-97.547 99.925,-97.547 99.925,-96.277 98.655,-96.277 98.655,-97.547 ; 98.655,-93.737 99.925,-93.737 99.925,-92.467 98.655,-92.467 98.655,-93.737 ; 98.655,-89.61 98.973,-89.61 99.29,-89.927 99.608,-89.61 99.925,-89.61 99.608,-89.292 99.925,-88.975 99.608,-88.975 99.29,-88.657 98.973,-88.975 98.655,-88.975 98.973,-89.292 98.655,-89.61 ; 98.655,-86.117 98.655,-85.8 98.973,-85.482 98.655,-85.165 98.655,-84.847 98.973,-84.847 99.29,-85.165 99.608,-84.847 99.925,-84.847 99.925,-85.165 99.608,-85.482 99.925,-85.8 99.925,-86.117 99.608,-86.117 99.29,-85.8 98.973,-86.117 98.655,-86.117 ; 98.655,-77.227 99.925,-77.227 99.29,-78.497 98.655,-77.227 ; 98.655,-74.052 99.29,-74.687 99.925,-74.052 99.29,-73.417 98.655,-74.052 ; 98.655,-70.877 99.29,-70.56 99.925,-70.877 99.608,-70.242 99.925,-69.607 99.29,-69.925 98.655,-69.607 98.973,-70.242 98.655,-70.877 ; 98.655,-62.94 98.973,-62.94 98.973,-63.257 99.608,-63.257 99.608,-62.94 99.925,-62.94 99.925,-62.305 99.608,-62.305 99.608,-61.987 98.973,-61.987 98.973,-62.305 98.655,-62.305 98.655,-62.94 ; 98.909,-97.293 99.671,-97.293 99.671,-96.531 98.909,-96.531 98.909,-97.293
  lines w0.381: 96.925,-98.69 195.451,-98.69 ; 96.925,-60.59 195.451,-60.59 ; 110.917,-102.5 110.917,-56.78 ; 128.642,-102.5 128.642,-56.78 ; 162.82,-102.5 162.82,-56.78 ; 175.669,-102.5 175.669,-56.78 ; 96.925,-102.5 195.451,-102.5 195.451,-56.78 96.925,-56.78 96.925,-102.5
  text "Symbol" at 99.211,-59.447 h1.83
  text "Hit Count" at 112.06,-59.447 h1.83
  text "Finished Hole Size" at 129.785,-59.447 h1.83
  text "Plated" at 163.963,-59.447 h1.83
  text "Hole Type" at 176.812,-59.447 h1.83
  text "1" at 112.06,-63.257 h1.52
  text "3.500mm (137.80mil)" at 129.785,-63.257 h1.52
  text "PTH" at 163.963,-63.257 h1.52
  text "Round" at 176.812,-63.257 h1.52
  text "2" at 112.06,-67.067 h1.52
  text "2.100mm (82.68mil)" at 129.785,-67.067 h1.52
  text "NPTH" at 163.963,-67.067 h1.52
  text "Round" at 176.812,-67.067 h1.52
  text "2" at 112.06,-70.877 h1.52
  text "3.000mm (118.11mil)" at 129.785,-70.877 h1.52
  text "PTH" at 163.963,-70.877 h1.52
  text "Round" at 176.812,-70.877 h1.52
  text "2" at 112.06,-74.687 h1.52
  text "3.250mm (127.95mil)" at 129.785,-74.687 h1.52
  text "NPTH" at 163.963,-74.687 h1.52
  text "Round" at 176.812,-74.687 h1.52
  text "4" at 112.06,-78.497 h1.52
  text "1.300mm (51.18mil)" at 129.785,-78.497 h1.52
  text "NPTH" at 163.963,-78.497 h1.52
  text "Round" at 176.812,-78.497 h1.52
  text "6" at 112.06,-82.307 h1.52
  text "0.762mm (30.00mil)" at 129.785,-82.307 h1.52
  text "PTH" at 163.963,-82.307 h1.52
  text "Round" at 176.812,-82.307 h1.52
  text "6" at 112.06,-86.117 h1.52
  text "0.900mm (35.43mil)" at 129.785,-86.117 h1.52
  text "PTH" at 163.963,-86.117 h1.52
  text "Round" at 176.812,-86.117 h1.52
  text "6" at 112.06,-89.927 h1.52
  text "2.850mm (112.20mil)" at 129.785,-89.927 h1.52
  text "NPTH" at 163.963,-89.927 h1.52
  text "Round" at 176.812,-89.927 h1.52
  text "43" at 112.06,-93.737 h1.52
  text "1.000mm (39.37mil)" at 129.785,-93.737 h1.52
  text "PTH" at 163.963,-93.737 h1.52
  text "Round" at 176.812,-93.737 h1.52
  text "72" at 112.06,-97.547 h1.52
  text "0.711mm (28.00mil)" at 129.785,-97.547 h1.52
  text "PTH" at 163.963,-97.547 h1.52
  text "Round" at 176.812,-97.547 h1.52
  text "144 Total" at 112.06,-101.357 h1.52

## Dimensions
0,-100 to 0,100 on Mechanical 13
-86.6,-50 to 86.6,-50 on Mechanical 13